# Altium PCB first_test.PcbDoc (part 3 of 5)
Units mil, origin at the board's own origin, x right, y up, seen from the top; angles counter-clockwise.
Board outline 3440.59 x 3087.6 mil, 4 copper layers (Top Layer, GND, VCC, Bottom Layer); 175 components, 91 nets, 2807 pads, 1128 vias.
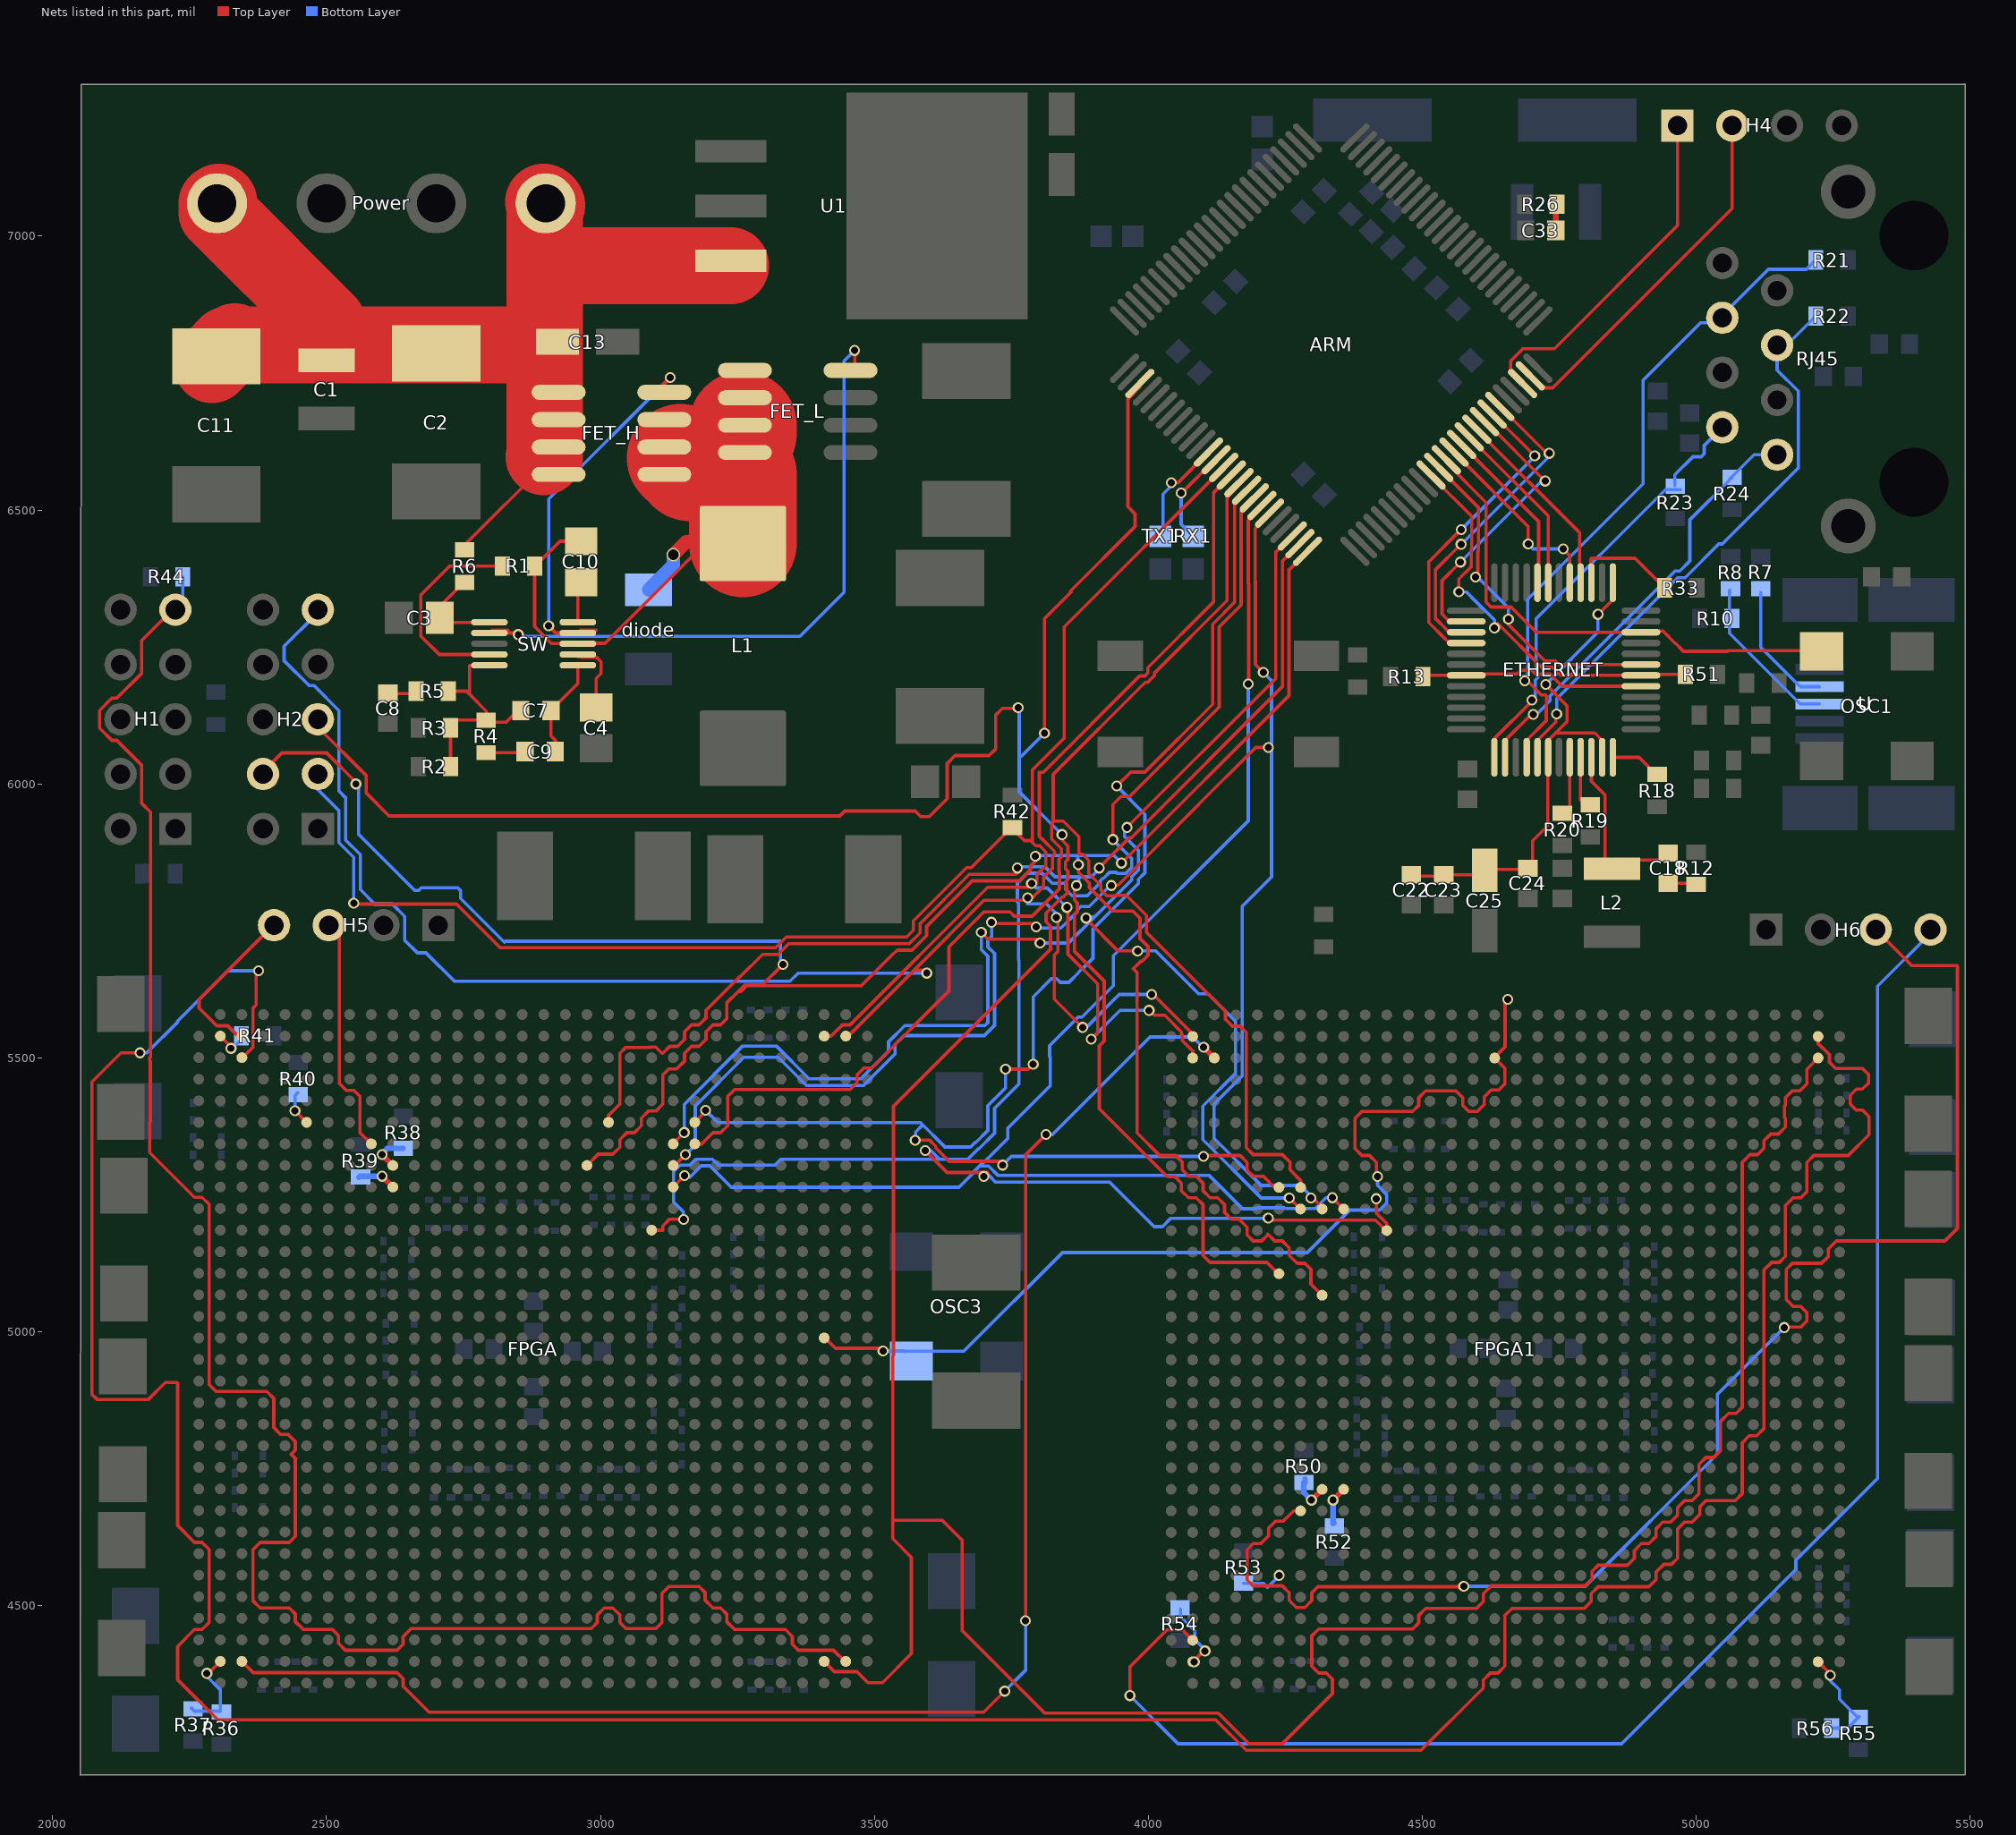
[diagram p5: the nets of this part, all layers, seen from the top]

## Via types
v1: diameter 20, hole 13, Top Layer to Bottom Layer, tented both sides, 907 vias
v2: diameter 20, hole 13, Top Layer to Bottom Layer, 189 vias
v3: diameter 30, hole 20, Top Layer to Bottom Layer, 14 vias
v4: diameter 40, hole 30, Top Layer to Bottom Layer, 12 vias
v5: diameter 50, hole 40, Top Layer to Bottom Layer, 5 vias
v6: diameter 25, hole 20, Top Layer to Bottom Layer, 1 vias

## Nets (pads, with @x,y where several pads share a name; then routed paths per layer and width w, separated by ;. In a path a pad name is that pad's centre, name@x,y a point inside that pad or via, vN(x,y) a via of type N, cw(c..) or ccw(c..) an arc to the next point about the centre after c; other vN are vias at no path point) (continued)
NetARM_53: ARM.53 FPGA1.AL30 FPGA.AL30 H2.5 | length 7459.4
  Top Layer w6: H2.5@2484.72,6102.83 2572.55,6015.01 2572.55,5982.95 2614,5941.5 3436.94,5941.5 3445.94,5950.5 3574.56,5950.5 3584.65,5940.41 3600.39,5940.41 3632.73,5972.75 3632.73,6037.19 3647.37,6051.83 3709.41,6051.83 3721.71,6064.14 3721.71,6126.17 3733.54,6138 v2@3762,6138 ; FPGA.AL30@3408.39,4397.84 3427.23,4378.99 3468.28,4378.99 3488.13,4359.15 3514.68,4359.15 3567.5,4411.97 3567.5,4587.87 3533.46,4621.91 3533.46,4955.41 3534.75,4956.7 3534.75,5411.39 3821.52,5698.16 ; 3533.5,4655.5 3623.75,4655.5 3660.22,4619.03 3660.22,4454.28 3811.03,4303.47 4127.66,4303.47 4183.63,4247.5 4244.72,4247.5 4336.2,4338.97 4336.2,4365.57 4325.16,4376.61 4311.23,4376.61 4298.51,4389.33 4298.51,4444.31 4311.23,4457.03 4482.64,4457.03 4493.68,4468.07 4493.68,4481.99 4506.4,4494.72 4599.06,4494.72 4611.79,4507.44 4611.79,4521.36 4626.19,4535.77 4797.6,4535.77 4810.32,4548.49 4810.32,4562.42 4821.36,4573.46 4874.66,4573.46 4887.38,4586.18 4887.38,4600.1 4900.1,4612.83 4914.03,4612.83 4926.75,4625.55 4926.75,4639.47 4939.47,4652.2 4953.4,4652.2 4966.12,4664.92 4966.12,4678.84 4978.84,4691.57 4992.77,4691.57 5005.49,4704.29 5005.49,4757.58 5018.21,4770.31 5032.14,4770.31 5044.86,4783.03 5044.86,4836.32 5059.27,4850.73 5073.19,4850.73 5084.23,4861.77 5084.23,5308.77 5098.64,5323.17 5112.56,5323.17 5123.6,5334.21 5123.6,5348.14 5136.32,5360.86 5150.25,5360.86 5162.97,5373.58 5162.97,5389.19 5161.5,5390.66 5161.5,5411.48 5162.97,5412.95 5162.97,5426.88 5175.69,5439.6 5189.62,5439.6 5202.34,5452.32 5202.34,5478.97 FPGA1.AL30@5222.87,5499.5 ; v2@3762.5,6138 v2(3762.5,6139) ; v2(3810.5,6092.5) 3810.5,6301.5 3859.5,6350.5 ; 3822.83,5698.82 3822.18,5698.82 3821.52,5698.16 ; v2(3842.5,5907.5) 3843,5907 3843,5896.78 3853.43,5886.36 3853.43,5862.3 3849,5857.87 3849,5844.97 3853.43,5840.55 3853.43,5825.8 3850,5822.37 3850,5806.63 3853.43,5803.2 3853.43,5801.95 3844.97,5793.5 3843.13,5793.5 3813.5,5763.87 3813.5,5748.13 3821.52,5740.11 3821.52,5698.16 ; 3858,6352 3976,6470 3976,6492.87 3962.76,6506.11 3962.76,6702.39 3984.62,6724.25 ARM.53@3984.62,6731.01
  Bottom Layer w6: v2@3764.35,6137.15 3764.35,6051 ; v2(3810.5,6092.5) 3769,6051 3764.35,6051 ; v2(3842.5,5907.5) 3764.35,5985.65 3764.35,6051
NetARM_62: ARM.62 TX1.1 | length 187.7
  Top Layer w6: v2(4042,6550) 4054.16,6550 ARM.62@4109.9,6605.74
  Bottom Layer w6: TX1.1@4027,6462 4027,6529 4045,6547 v2(4042,6550)
NetARM_63: ARM.63 RX1.1 | length 168.6
  Top Layer w6: v2(4060,6531) 4061,6531 4121.82,6591.82 ARM.63@4123.82,6591.82
  Bottom Layer w6: v2(4060,6531) 4060,6474 RX1.1@4076,6458
NetARM_64: ARM.64 FPGA1.B30 FPGA.B30 H2.3 R42.1 | length 3697.7
  Top Layer w6: H2.3@2483.46,6010.79 H2.3@2506.85,6010.79 ; v2(2549.5,5782) 2550.97,5780.53 2737.26,5780.53 2816.9,5700.88 3319.54,5700.88 3339.19,5720.53 3559.02,5720.53 3571.32,5732.83 3571.32,5749.8 3668.52,5847 3677,5847 R42.1@3753.5,5923.5 ; FPGA.B30@3408.39,5539.57 3421.11,5539.57 3441.64,5560.09 3455.78,5560.09 3706.69,5811 3780,5811 v2(3787,5818) ; R42.1@3751.24,5921.24 R42.1@3752,5920.47 ; R42.1@3755.51,5914.57 3773.55,5896.53 3788.53,5896.53 ; v2@3796.87,5818 3796.87,5834.52 3813,5850.66 3813,5875.87 3801.87,5887 3794.37,5887 3788.53,5892.84 3788.53,5896.53 ; v2(3851.5,5774.5) 3853.5,5772.5 3853.5,5688.97 3907.5,5634.97 3907.5,5545.5 v2(3896,5534) ; v1(4001.5,5586.5) 4010.56,5577.44 4030.25,5577.44 4060.61,5547.08 4060.61,5543 4060.91,5542.7 ; 4060.91,5543 4060.91,5542.7 ; FPGA1.B30@4081.13,5499.5 4081.13,5512.22 4062.29,5531.06 4062.29,5541.31 4060.91,5542.7 ; FPGA1.B30@4081.43,5499.39 FPGA1.B30@4081.43,5499.5 ; ARM.64@4137.74,6577.9 3846.5,6286.66 3846.5,6083.47 3788.53,6025.5 3788.53,5896.53
  Bottom Layer w6: H2.3@2484,6018 2484,5989.78 2522.53,5951.26 2522.53,5892.99 2549.5,5866.02 v2(2549.5,5782) ; v2(3787,5818) 3795,5810 3816,5810 v2(3851.5,5774.5) ; v2(3896,5534) 3948.5,5586.5 v1(4001.5,5586.5)
NetARM_65: ARM.65 FPGA1.B31 FPGA.B31 H2.9 | length 3720.4
  Top Layer w6: FPGA.B31@3447.76,5539.57 3452.23,5539.57 3572.34,5659.68 ; v2@3590.46,5659.68 3572.34,5659.68 ; v2@3780,5787.35 3700.01,5787.35 3572.34,5659.68 ; v2(3780,5792) 3788,5792 3796.5,5800.5 ; 3796.66,5800.34 3808.87,5812.54 3808.87,5829.55 3825,5845.69 3825,5867.81 3829.43,5872.24 3829.43,5876.42 3806.84,5899 3806.22,5899 3801,5904.22 3801,6020.87 3807.87,6020.87 3984.24,6197.24 3993.93,6197.24 3999.2,6202.51 3999.2,6212.2 4119,6332 4119,6531.32 ARM.65@4151.66,6563.98 ; v2(3832.5,5756) 3834.5,5758 3837,5758 3834.83,5755.83 3834.83,5693.85 3828.28,5687.3 3828.28,5607.22 v2(3880,5555.5) ; v1(4006,5615.5) 4009.16,5615.5 4081.43,5543.23 FPGA1.B31@4081.43,5538.76
  Bottom Layer w6: H2.9@2480.32,6309.06 2422.53,6251.27 2422.53,6224.99 2468.04,6179.47 2477.01,6179.47 2522.53,6133.96 2522.53,5987.06 2534.53,5975.06 2534.53,5897.96 2561.5,5870.99 2561.5,5807.07 2588.04,5780.53 2619.96,5780.53 2642.53,5757.96 2642.53,5726.04 ; 2642.35,5725.87 2642.35,5714.89 2665.77,5691.47 2681.48,5691.47 2733.45,5639.5 3345.84,5639.5 3360.79,5654.45 v2(3595.68,5654.45) ; v2(3780,5792) 3780,5781 3814,5781 3837,5758 3834.5,5758 v2(3832.5,5756) ; v2(3880,5555.5) 3883.5,5552 3947,5615.5 v1(4006,5615.5)
NetARM_66: ARM.66 FPGA1.G24 FPGA.G24 | length 2773.6
  Top Layer w6: FPGA.G24@3172.17,5342.72 3184.89,5342.72 3205.42,5363.24 3219.34,5363.24 3232.06,5375.97 3232.06,5429.26 3244.79,5441.98 3455.56,5441.98 3468.28,5454.71 3468.28,5468.63 3481.01,5481.35 3495.15,5481.35 3636,5622.2 3636,5702.53 3699.79,5766.32 3747.18,5766.32 ; 3747.68,5766.32 3755.5,5758.5 3788.13,5758.5 3838,5808.37 3838,5839 ; 3826.5,6017 3826.5,5935 3829.5,5932 3844.87,5932 3873.36,5903.51 3873.36,5871.51 3880.37,5871.5 3891.5,5860.37 3891.5,5836.64 3913.5,5814.64 3913.5,5806.63 3924.63,5795.5 3940.37,5795.5 ; 3826.5,6017.46 3994.27,6185.24 3998.9,6185.24 4011.2,6197.54 4011.2,6202.17 4143.71,6334.67 4143.71,6523.1 4167.5,6546.89 ARM.66@4167.5,6549.5 ; 3828.07,5932 3823.5,5927.43 3823.5,5899.31 3841.43,5881.39 3841.43,5867.27 3837,5862.84 3837,5840 ; 3941.34,5796.47 3960.16,5796.47 3996.76,5759.87 3996.76,5729.03 4139.65,5586.15 ; 4139.65,5584.7 4141.03,5583.31 4141.03,5570.43 4153.75,5557.71 4167.68,5557.71 4178.72,5546.67 4178.72,5335.9 4191.44,5323.17 4244.73,5323.17 4259.14,5308.77 4259.14,5294.84 4277.98,5276 FPGA1.G24@4277.98,5263.28 ; FPGA1.G24@4278.28,5263.17 FPGA1.G24@4278.28,5263.28
NetARM_67: ARM.67 FPGA1.F24 FPGA.F24 | length 2811.1
  Top Layer w6: FPGA.F24@3172.17,5382.09 v1@3191.93,5401.85 ; v2(3574.5,5349.5) 3600.87,5349.5 3612,5338.37 3612,5335.38 3636.36,5311.02 3726.98,5311.02 v2(3734,5304) ; v2(3739.49,5479.29) 3780.87,5479.29 v2(3789.92,5488.35) ; v2(3942.5,5996) 3968.15,6021.65 3993.93,6021.65 4117.5,6145.21 4117.5,6291.49 4157.38,6331.37 4157.38,6512.38 ARM.67@4178,6533 ; v1(4101,5320) 4102.49,5321.49 4167.68,5321.49 4180.4,5308.77 4180.4,5294.84 4191.44,5283.8 4209.92,5283.8 4230.45,5263.28 FPGA1.F24@4238.61,5263.28 ; FPGA1.F24@4238.71,5263.37 FPGA1.F24@4238.91,5263.17
  Bottom Layer w6: v1(3191.93,5404.13) 3214.66,5381.4 3584.31,5381.4 3628.69,5337.02 3675.74,5337.02 3684.22,5345.5 3685.51,5345.5 3707.31,5367.3 3707.31,5412.8 3739.49,5444.98 v2(3739.49,5479.29) ; v2(3574.5,5349.5) 3575.5,5350.5 3575.5,5364.5 3588,5377 ; v2(3734,5304) 3750,5320 v1(4101,5320) ; v2(3789.92,5488.35) 3789.92,5611.26 3823.31,5644.65 3832.41,5644.65 3839.41,5637.65 3855.15,5637.65 3873.35,5655.85 ; 3873.35,5656.82 3880.38,5663.85 ; 3881.35,5663.85 3899.1,5681.6 3899.1,5735.09 3982.01,5817.99 3982.01,5825.7 3994,5837.69 3994,5944.5 v2(3942.5,5996)
NetARM_68: ARM.68 FPGA1.L22 FPGA.L22 | length 3365.7
  Top Layer w6: FPGA.L22@3093.43,5185.24 3113.95,5185.24 3113.95,5193.04 3125.83,5204.92 v1(3151.65,5204.92) ; v2(3593,5330.5) 3633,5290.5 3707,5290.5 v2(3700,5283.5) ; v2(3935.5,5898.5) 3935.5,5962.37 3950.13,5977 3966.26,5977 4129.5,6140.24 4129.5,6286.52 4169.38,6326.4 4169.38,6497.38 ARM.68@4184,6512 ; ARM.68@4183.6,6512.4 ARM.68@4193.41,6522.22 ; v1(4218.93,5207.04) 4222.59,5203.38 4414.94,5203.38 4433.78,5184.54 FPGA1.L22@4435.46,5184.54 4435.46,5197.26 4416.62,5216.1 4416.62,5238.38 v1@4416.08,5238.92 ; v1@4416,5239 v1@4416.08,5238.92 ; v1(4416.08,5242.65) v1@4416.08,5238.92 ; FPGA1.L22@4435.76,5184.43 FPGA1.L22@4435.76,5184.54
  Bottom Layer w6: v1(3151.65,5204.92) 3151.65,5218.25 3133.48,5236.42 3133.48,5291.93 3145.61,5304.06 3163.14,5304.06 3173.75,5314.66 3204.69,5314.66 3215.32,5304.03 3318.33,5304.03 3328.96,5314.66 3670.35,5314.66 3689.19,5333.5 3690.48,5333.5 3719.31,5362.33 3719.31,5407.83 3763.84,5452.37 3763.84,5677.75 3763.4,5678.19 3763.4,5781.73 3761,5784.13 3761,5818.87 3779.13,5837 3805.97,5837 3824.62,5818.35 3847.28,5818.35 3850,5815.63 3850,5806.63 3861.13,5795.5 3888.39,5795.5 3912.65,5819.76 3912.65,5823.34 3916.81,5827.5 3918.37,5827.5 3929.5,5838.63 3941,5838.63 3943.13,5836.5 3958.87,5836.5 3970,5847.63 3970,5863.37 3935.87,5897.5 3935.87,5898.13 v2(3935.5,5898.5) ; v2(3593,5330.5) 3603,5330.5 3618.5,5315 ; v2(3700,5283.5) 3703.66,5287.16 3707,5287.16 3721.16,5273 3929.25,5273 4010.44,5191.81 4026.18,5191.81 4041.41,5207.04 v1(4218.93,5207.04)
NetARM_69: ARM.69 FPGA1.J23 FPGA.J23 | length 2753.4
  Top Layer w6: FPGA.J23@3135.04,5263.9 3135.04,5266.61 v1(3153.43,5285) ; v2(4182.5,6182.5) 4183.5,6183.5 4183.5,6364.97 4182.5,6365.97 4182.5,6481.5 ARM.69@4208.5,6507.5 ; v1(4336,5244.43) 4354.39,5226.04 FPGA1.J23@4357.1,5226.04
  Bottom Layer w6: v1(3153.43,5285) 3153.43,5283.66 3154.8,5282.28 3163.6,5282.28 3183.98,5302.66 3199.72,5302.66 3238.94,5263.44 3654.36,5263.44 3681,5290.08 3681,5291.37 3699.13,5309.5 3700.42,5309.5 3743.31,5352.39 3743.31,5370.83 3820.92,5448.44 3820.92,5501.19 3819.87,5502.24 3819.87,5522.24 3872.13,5574.5 3879.13,5574.5 3936.1,5631.47 3936.1,5686.06 4182.5,5932.46 v2(4182.5,6182.5) ; 3692.5,5302.5 3708.63,5302.5 3726.13,5285 4111.47,5285 4171.99,5224.48 4197.29,5224.48 4198.86,5226.04 4248.46,5226.04 4249.55,5224.95 4304.82,5224.95 4324.3,5244.43 v1(4336,5244.43) 4337.34,5244.43 v1@4338.72,5245.8
NetARM_70: ARM.70 FPGA1.H23 FPGA.H23 | length 3072.2
  Top Layer w6: FPGA.H23@3132.8,5303.35 3135.56,5303.35 v1(3155.27,5323.06) ; v2@3713.77,5744.88 v2@3794.29,5744.88 ; v2@3932.5,5815.47 3945.39,5815.47 4091.23,5961.31 ; 4090,5960.5 4196,6066.5 v2(4219.5,6066.5) ; v2(4210,6203.5) 4195.5,6218 4195.5,6369.94 4195,6370.44 4195,6466 ARM.70@4214,6485 ; v1@4297.94,5246.27 4317.65,5226.56 FPGA1.H23@4317.65,5223.8
  Bottom Layer w6: v1(3155.27,5323.06) 3172.93,5340.72 3172.93,5412 3261.81,5500.88 3324.49,5500.88 3375.86,5449.51 3480.28,5449.51 3537.81,5507.04 3537.81,5524.01 3554.39,5540.59 3700.72,5540.59 3719.31,5559.18 3719.31,5690.33 3707.31,5702.33 3707.31,5714.22 3714.24,5721.15 v2@3714.24,5746.85 ; v2@3797.5,5737 3840.87,5737 3870.5,5766.63 3870.5,5769.87 3876.63,5776 3892.18,5776 v2@3931.59,5815.41 ; v2(4210,6203.5) 4224.87,6188.63 4224.87,5829.89 4171.49,5776.51 4171.49,5466.86 4120.12,5415.49 4120.12,5352.81 4206.14,5266.78 4277.43,5266.78 v1@4297.94,5246.27
  other v1: 4297,5244
  other v2: 3795.5,5739 3713.77,5747.32 3932.5,5814.5
NetARM_73: ARM.73 FPGA1.G23 FPGA.G23 | length 2877.7
  Top Layer w6: FPGA.G23@3132.8,5342.72 3132.8,5343.43 v1(3152.95,5363.58) ; v2(3695.24,5729.02) 3707.6,5716.65 3795.32,5716.65 v2(3802.52,5709.45) ; v2(3886.5,5755) 3885.5,5756 v2@3887.5,5756 ; v2@3887.5,5752.5 3945,5695 v2(3980.5,5695) ; v2(3961,5920.5) 4232.8,6192.3 4232.8,6423.3 4263,6453.5 ARM.73@4263,6454.5 ; v1(4257.42,5243.95) 4277.57,5223.8 FPGA1.G23@4278.28,5223.8
  Bottom Layer w6: v1(3152.95,5363.58) 3152.95,5414.74 3259.71,5521.5 3320.84,5521.5 3380.83,5461.51 3475.31,5461.51 3525.81,5512.01 3525.81,5528.98 3555.7,5558.87 3702.03,5558.87 3707.31,5564.15 3707.31,5685.35 3695.24,5697.43 v2(3695.24,5729.02) ; v2(3802.52,5709.45) 3854.32,5709.45 3901.87,5757 ; v2(3886.5,5755) 3884.5,5757 3901.87,5757 ; 3905,5760 3902,5757 3901.87,5757 ; v2(3961,5920.5) 3956.51,5916.01 3956.51,5904.01 3982,5878.51 3982,5842.66 3970.01,5830.67 3970.01,5825.14 3901.87,5757 ; v2(3980.5,5695) 4013.83,5695 4092.02,5616.81 4108.99,5616.81 4159.49,5566.31 4159.49,5471.83 4099.5,5411.84 4099.5,5350.71 4206.26,5243.95 v1(4257.42,5243.95)
NetARM_74: ARM.74 FPGA1.F20 FPGA.F20 | length 2904.4
  Top Layer w6: FPGA.F20@3014.69,5382.09 3014.69,5394.81 3035.21,5415.34 3035.21,5508 3046.25,5519.04 3090.55,5519.04 ; 3090.55,5519.69 3100.59,5519.69 3112.27,5508 ; 3113.95,5508 3126.68,5520.72 3140.6,5520.72 3153.32,5533.45 3153.32,5547.37 3166.05,5560.09 3179.97,5560.09 3192.69,5572.82 3192.69,5586.74 3253.98,5648.02 ; 3254.5,5647.5 3295.88,5688.88 3324.51,5688.88 3344.16,5708.53 3563.99,5708.53 3583.32,5727.86 3583.32,5744.83 3673.49,5835 3758.5,5835 v2@3765.5,5842 ; v2@3865.5,5811 3865.5,5787.37 3870.5,5782.37 3870.5,5766.63 3865.5,5761.63 3865.5,5693.95 3919.5,5639.95 3919.5,5530.63 3910.65,5521.78 3910.65,5407.11 4034.07,5283.69 4037,5283.69 ; v2@3913,5845.5 3913,5849.5 3943,5879.5 3943.37,5879.5 3954.5,5890.63 3954.5,5891 3965,5901.5 3968.87,5901.5 4244.8,6177.43 4244.8,6406.57 ARM.74@4276.93,6438.7 ; 4037,5283 4048.69,5283 4060.61,5271.08 4060.61,5257.16 4073.33,5244.43 4087.25,5244.43 4099.98,5231.71 4099.98,5139.05 4112.7,5126.32 4216.4,5126.32 4236.93,5105.8 FPGA1.F20@4238.61,5105.8 ; FPGA1.F20@4238.61,5105.69 FPGA1.F20@4238.91,5105.69
  Bottom Layer w6: v2@3763.5,5849 3810.94,5849 3829.59,5830.35 3873.5,5830.35 ; v2@3873.5,5819 3873.5,5830.35 ; v2@3910.51,5844.49 3896.38,5830.35 3873.5,5830.35
  other v2: 3869,5814.5 3761,5846.5 3910.5,5846.5
NetARM_75: ARM.75 FPGA1.H19 FPGA.H19 H2.4 | length 4444
  Top Layer w6: H2.4@2381.95,6020.06 2418.42,6056.53 2499.96,6056.53 v2@2553.55,6002.93 ; FPGA.H19@2975.32,5303.35 2995.84,5323.87 3022.49,5323.87 3035.21,5336.6 3035.21,5350.52 3047.94,5363.24 3061.86,5363.24 3074.58,5375.97 3074.58,5389.89 3087.31,5402.61 3101.23,5402.61 3113.95,5415.34 3113.95,5468.63 3124.99,5479.67 3138.92,5479.67 3153.32,5494.08 3153.32,5508 3166.05,5520.72 3179.97,5520.72 3192.69,5533.45 3192.69,5547.37 3205.42,5560.09 3219.34,5560.09 3230.38,5571.13 3230.38,5600.02 3251.68,5621.32 ; 3263.68,5633.32 3251.68,5621.32 ; 3264,5633 3295.5,5633 v2(3333,5670.5) ; 3533.91,5689.41 3476.26,5631.76 3266.97,5631.76 3256.54,5621.32 3251.68,5621.32 ; 3534.49,5689.41 3541.61,5696.53 3568.96,5696.53 3595.32,5722.89 3595.32,5739.86 3678.47,5823 3764.37,5823 3784.87,5843.5 3784.87,5849.83 v2@3796.65,5861.61 ; v2(3872.5,5852.5) 3872.5,5838.67 3892.5,5818.67 3892.5,5810.66 3935.16,5768 3971.67,5768 3984.76,5754.9 3984.76,5717.61 3999.5,5702.87 3999.5,5687.13 3988.37,5676 ; v2(3951,5855.5) 4256.8,6161.3 4256.8,6390.73 ARM.75@4288.5,6422.43 ; 3986.39,5676 3972.76,5662.37 3979.63,5655.51 3979.63,5362.72 4020.98,5321.38 ; 4021.51,5321.49 4049.57,5321.49 4062.29,5308.77 4062.29,5294.84 4073.33,5283.8 4087.25,5283.8 4099.98,5271.08 4099.98,5257.16 4112.7,5244.43 4126.62,5244.43 4139.35,5231.71 4139.35,5217.79 4152.07,5205.06 4165.99,5205.06 4180.4,5190.66 4180.4,5176.73 4191.44,5165.69 4207.05,5165.69 4218.09,5176.73 ; 4218.09,5178.42 4230.81,5165.69 4244.73,5165.69 4257.46,5152.97 4257.46,5139.05 4271.86,5124.64 4285.79,5124.64 4296.83,5113.6 4296.83,5086.95 FPGA1.H19@4317.35,5066.43 ; ARM.75@4288.5,6423.5 ARM.75@4288.5,6422.43 ; ARM.75@4290.85,6424.78 ARM.75@4288.5,6422.43 ; FPGA1.H19@4317.45,5066.52 FPGA1.H19@4317.65,5066.32
  Bottom Layer w6: v2(2553.55,5999.87) 2558.53,5994.9 2558.53,5907.9 2661.17,5805.26 2667.47,5805.26 2672.74,5810.53 2739.26,5810.53 2744.53,5805.26 2744.53,5790.94 2824.68,5710.79 ; 2826.78,5712.88 3328.5,5712.88 3328.5,5675 v2(3333,5670.5) ; v2@3800,5869 3871.5,5869 ; v2@3871.5,5853.5 3871.5,5869 ; v2(3951,5855.5) 3937.5,5869 3871.5,5869
  other v2: 3794,5868
NetARM_86: ARM.86 ETHERNET.30 R51.1 | length 735
  Top Layer w6: ARM.86@4519.5,6559.5 4590.5,6488.5 4590.5,6430.13 4589.5,6429.13 4589.5,6396.37 4567,6373.87 v2(4567,6350.5) ; v2(4631.98,6284.75) 4631.98,6286.98 4638,6293 4718.5,6212.5 4738.34,6212.5 4752.68,6198.16 ETHERNET.30@4899.45,6198.16 ; ETHERNET.30@4906.5,6198 4908.5,6200 R51.1@4980.47,6200
  Bottom Layer w6: v2(4567,6350.5) 4580.5,6350.5 4597.5,6333.5 4631.98,6299.02 v2(4631.98,6284.75)
NetARM_87: ARM.87 ETHERNET.31 | length 618.6
  Top Layer w6: ARM.87@4532,6576.5 ARM.87@4540,6568.5 ; ARM.87@4539.5,6568 4602.5,6505 4602.5,6425.16 4601.5,6424.16 4601.5,6377.5 v2(4597.5,6377.5) ; v2(4657.5,6301) 4657,6300.5 4657,6291.57 4724.07,6224.5 4743.31,6224.5 4749.97,6217.84 ETHERNET.31@4899.45,6217.84
  Bottom Layer w6: v2(4597.5,6377.5) 4601.5,6377.5 4601.5,6377.26 4657.5,6321.26 v2(4657.5,6301)
NetARM_88: ARM.88 ETHERNET.34 OSC1.3 | length 931
  Top Layer w6: ARM.88@4547.5,6588.5 4547.5,6583 4616.83,6513.67 4616.83,6424.2 4616.5,6423.87 4616.5,6332.07 4625.56,6323.01 4662.36,6323.01 4708.47,6276.9 ETHERNET.34@4899.45,6276.9 ; ETHERNET.34@4906,6279 4939.63,6279 4962.13,6256.5 4962.87,6256.5 4974,6245.37 4974,6244.63 4976.63,6242 5057.63,6242 5058.63,6243 5228.32,6243 OSC1.3@5229.32,6242
NetARM_89: ARM.89 ETHERNET.41 | length 355.2
  Top Layer w6: ARM.89@4567.4,6600.5 4563,6600.5 4693.5,6470 v2(4693.5,6438) ; v2(4757.5,6429) 4769.53,6416.97 ETHERNET.41@4769.53,6367.45
  Bottom Layer w6: v2(4693.5,6438) 4702.5,6429 v2(4757.5,6429)
NetARM_90: ARM.90 ETHERNET.44 | length 306.1
  Top Layer w6: ARM.90@4574.5,6613.5 4578,6613.5 4712.5,6479 4712.5,6369.48 ETHERNET.44@4710.47,6367.45
NetARM_91: ARM.91 ETHERNET.43 | length 321.5
  Top Layer w6: ARM.91@4589,6630.5 4730.16,6489.34 ETHERNET.43@4730.16,6367.45
NetARM_92: ARM.92 ETHERNET.40 | length 341.8
  Top Layer w6: ARM.92@4603.5,6641.5 4604.5,6641.5 4784.43,6461.57 4787.5,6458.5 ETHERNET.40@4787.5,6376.5
NetARM_93: ARM.93 ETHERNET.2 | length 529.2
  Top Layer w6: 4542.5,6303.5 4549.42,6296.58 ETHERNET.2@4580.55,6296.58 ; 4544.85,6301.36 4536.12,6310.09 4536.12,6371.12 v2(4570,6405) ; ARM.93@4617,6658.5 4619,6658.5 v2(4724.5,6553)
  Bottom Layer w6: v2(4570,6405) 4718,6553 v2(4724.5,6553)
NetARM_94: ARM.94 ETHERNET.4 | length 573
  Top Layer w6: v2(4571.5,6464) 4570.63,6464 4512.12,6405.49 4512.12,6294.72 4540.92,6265.92 4544.85,6261.99 4549.63,6257.21 ETHERNET.4@4580.55,6257.21 ; ARM.94@4631,6670.5 4634,6670.5 v2(4705.5,6599)
  Bottom Layer w6: v2(4571.5,6464) 4705.5,6598 v2(4705.5,6599)
NetARM_95: ARM.95 ETHERNET.3 | length 584.2
  Top Layer w6: 4542,6284 4549.1,6276.9 ETHERNET.3@4580.55,6276.9 ; 4544.85,6281.68 4524.12,6302.41 4524.12,6390.62 v2(4571,6437.5) ; ARM.95@4642,6688.5 4642.87,6688.5 4724.5,6606.87 4724.5,6606 4727,6603.5 v2(4732,6603.5)
  Bottom Layer w6: v2(4571,6437.5) 4571.87,6437.5 4732,6597.63 v2(4732,6603.5)
NetARM_98: ARM.98 H4.1 | length 629.5
  Top Layer w6: ARM.98@4674,6737.5 4661.51,6749.99 4661.51,6771.98 4684.16,6794.63 4741.63,6794.63 4966,7019 H4.1@4966,7202
NetARM_99: ARM.99 H4.2 | length 666.4
  Top Layer w6: ARM.99@4696.5,6747 4720.43,6723.07 4738.27,6723.07 5066,7050.8 H4.2@5066,7202
NetC3_1: C3.1 R6.1 SW.1 | length 156.1
  Top Layer w6: C3.1@2706.69,6303.15 2706.69,6324.02 R6.1@2749.17,6366.5 ; C3.1@2723.31,6294.96 SW.1@2798.46,6294.96
NetC4_2: C4.2 SW.7 | length 143.5
  Top Layer w6: SW.7@2953.46,6237.83 SW.7@2959.65,6231.65 ; SW.7@2958.66,6236.22 2959.84,6236.22 2964.62,6231.44 2992.39,6231.44 3001.12,6222.71 3001.12,6201.63 2992.13,6192.63 C4.2@2992.13,6139.76
NetC7_1: C7.1 R2.1 R3.2 R4.2 R5.1 SW.5 | length 417.2
  Top Layer w6: R5.1@2722.44,6169.29 2755.83,6169.29 2760.76,6164.36 ; R3.2@2723.39,6101.69 R3.2@2723.39,6112.48 ; R2.1@2726.38,6031.5 R3.2@2726.38,6102.36 ; R3.2@2727.32,6116.42 R4.2@2791.34,6116.42 ; 2763.24,6161.02 2791.34,6132.93 R4.2@2791.34,6116.42 ; 2763.24,6161.04 2763.66,6161.46 2760.76,6164.36 ; R4.2@2791.34,6116.14 R4.2@2791.34,6116.42 ; SW.5@2797.24,6216.54 2760.76,6216.54 2760.76,6164.36 ; C7.1@2852.68,6137.56 2827.6,6112.48 2789.76,6112.48 2792.38,6115.1 2793.7,6116.42 R4.2@2791.34,6116.42
NetC7_2: C7.2 C9.2 SW.6 | length 200.4
  Top Layer w6: C7.2@2905.79,6140.51 C7.2@2910.95,6135.35 ; C9.2@2917.32,6059.06 2917.32,6079.77 2909.45,6087.65 C7.2@2909.45,6133.86 C7.2@2910.95,6135.35 ; C7.2@2917.32,6128.98 C7.2@2910.95,6135.35 ; SW.6@2958.39,6219.65 2958.39,6182.79 C7.2@2910.95,6135.35
NetC8_2: C8.2 R5.2 | length 59
  Top Layer w6: C8.2@2606.3,6165.36 2627.03,6165.36 2627.35,6165.04 2652.17,6165.04 2656.42,6169.29 R5.2@2663.38,6169.29
NetC9_1: C9.1 R4.1 | length 71.7
  Top Layer w6: R4.1@2791.34,6057.09 2850.9,6057.09 2852.87,6059.06 C9.1@2862.21,6059.06
NetC10_1: C10.1 diode.2 FET_H.1 FET_H.2 FET_H.3 FET_L.5 FET_L.6 FET_L.7 FET_L.8 L1.1 R1.2 SW.8 | length 1210
  Top Layer w6: R1.2@2879.92,6397.64 2879.92,6287.21 2910.63,6256.5 SW.8@2955.39,6256.5 ; R1.2@2879.96,6396.73 2926.14,6442.91 2956.26,6442.91 C10.1@2958.27,6440.91 ; SW.8@2953.07,6256.65 2955.39,6256.65 3008.27,6256.65 L1.1@3190.59,6438.98 ; 3163.67,6438.98 L1.1@3190.59,6438.98 ; L1.1@3193.9,6442.28 L1.1@3190.59,6438.98 ; L1.1@3259.84,6438.98 L1.1@3190.59,6438.98
  Top Layer w25: FET_H.3@3116.46,6665 3164.96,6616.5 FET_L.8@3253.5,6616.5 ; v6(3133,6418.5) 3156.5,6442 L1.1@3218,6442
  Top Layer w196.85: 3146.65,6595.19 3163.34,6578.5 ; L1.1@3259.84,6438.98 3259.84,6565 ; 3259.84,6639.99 FET_L.7@3259.84,6655
  Bottom Layer w25: diode.2@3088,6354.44 3133,6399.44 v6(3133,6418.5)
NetC10_2: C10.2 SW.10 | length 68.8
  Top Layer w6: SW.10@2958.66,6295.28 2958.66,6361.1 C10.2@2960.79,6363.23
NetC18_1: C18.1 ETHERNET.22 L2.2 | length 328.4
  Top Layer w6: ETHERNET.22@4808.9,6048.55 4808.9,6004.58 4833.8,5979.67 4833.8,5852.7 L2.2@4841.5,5845 ; L2.2@4844.33,5862.91 4846.46,5860.79 4933.94,5860.79 C18.1@4948.7,5875.55
NetC18_2: C18.2 R12.2 | length 58.3
  Top Layer w6: C18.2@4948.82,5818.46 5002.48,5818.46 R12.2@5005.75,5821.73
NetC22_1: C22.1 C23.1 C24.1 C25.1 ETHERNET.18 ETHERNET.23 ETHERNET.37 | length 960.9
  Top Layer w6: C22.1@4484.96,5831.42 4536.57,5831.42 C23.1@4539.37,5834.21 4607.01,5834.21 4616.61,5843.82 C24.1@4691.32,5843.82 ; C24.1@4691,5843.5 C24.1@4691.32,5843.82 ; C24.1@4691.99,5842.51 4693.31,5843.82 C24.1@4691.32,5843.82 ; v2(4725.5,6181.5) 4764.5,6142.5 4764.5,6113.82 4743.67,6092.98 ; v2(4821,6309.5) 4821.24,6309.5 4847.5,6335.76 ETHERNET.37@4847.5,6369.5 ; ETHERNET.23@4829.5,6048.5 4830,6049 4830,6078.06 4815.07,6092.98 4743.67,6092.98 ; C24.1@4691.32,5843.82 4701.69,5854.19 4701.69,5896.27 4729.19,5923.77 4729.19,6047.58 ETHERNET.18@4730.16,6048.55 4730.16,6079.47 4743.67,6092.98
  Bottom Layer w6: v2(4725.5,6181.5) 4821,6277 v2(4821,6309.5)
NetC33_2: C33.2 R26.2 | length 44.1
  Top Layer w10: C33.2@4744.06,7010.5 4744.06,7052.56 R26.2@4745.5,7054
NetETHERNET_7: ETHERNET.7 ETHERNET.29 R13.1 | length 420
  Top Layer w6: R13.1@4499,6199.5 4500.34,6198.16 ETHERNET.7@4577.66,6198.16 ; ETHERNET.7@4577.5,6198 ETHERNET.7@4577.66,6198.16 ; ETHERNET.7@4580.55,6198.16 ETHERNET.7@4577.66,6198.16 ; ETHERNET.29@4899.45,6178.47 4755.4,6178.47 4733.37,6200.5 4707.37,6200.5 4700.37,6207.5 4679.63,6207.5 4673.13,6201 4580.5,6201 ETHERNET.7@4577.66,6198.16
NetETHERNET_13: ETHERNET.13 R23.2 RJ45.2 | length 817.8
  Top Layer w6: ETHERNET.13@4631.73,6048.55 4631.73,6082.6 v2@4700.63,6151.5 ; v2(4700.26,6153) 4708,6153 4702.13,6153 v2@4700.63,6151.5 ; v2@4703.5,6151.5 v2@4700.63,6151.5
  Bottom Layer w6: v2(4700.26,6153) 4706.5,6159.24 4706.5,6189.37 4711.5,6194.37 4711.5,6196.37 4708,6199.87 4708,6301.5 4944,6537.5 R23.2@4972,6537.5 ; R23.2@4961.5,6544.5 4961.5,6564.5 4994.3,6597.3 5009.63,6597.3 5014.9,6602.57 5014.9,6617.9 RJ45.2@5048,6651
NetETHERNET_14: ETHERNET.14 R24.1 RJ45.1 | length 794.7
  Top Layer w6: ETHERNET.14@4650.5,6053.5 4650.5,6078.56 4698.94,6127 v2(4703,6127)
  Bottom Layer w6: v2(4703,6127) 4708.87,6127 4733.5,6151.63 4733.5,6160.34 4961.66,6388.5 4970.37,6388.5 4988.72,6406.85 4988.72,6482.24 R24.1@5066,6559.53 ; R24.1@5061,6556 5106,6601 RJ45.1@5148,6601
NetETHERNET_16: ETHERNET.16 R21.2 RJ45.6 | length 1221.5
  Top Layer w6: v2(4687.5,6188.5) 4691.63,6188.5 4717.63,6162.5 4725.37,6162.5 4727,6160.87 4727,6135.87 4726.5,6135.37 4726.5,6119.63 4727,6119.13 4727,6115.69 4726.66,6115.34 ; ETHERNET.16@4690.79,6048.55 4690.79,6079.79 4726.5,6115.5
  Bottom Layer w6: v2(4687.5,6188.5) 4692.5,6188.5 4692.5,6337.13 4903.28,6547.91 4903.28,6737.04 5008.25,6842 RJ45.6@5051,6842 ; RJ45.6@5049.21,6856.7 5132.04,6939.53 5201.34,6939.53 R21.2@5218.5,6956.69
NetETHERNET_17: ETHERNET.17 R22.1 RJ45.5 | length 1082.8
  Top Layer w6: ETHERNET.17@4710.47,6048.55 4710.47,6079.47 4744,6113 v2@4744,6126.5 ; v2@4745.5,6125 v2(4745.5,6127.5)
  Bottom Layer w6: v2(4745.5,6127.5) 4745.5,6155.37 4966.63,6376.5 4979.91,6376.5 5041.55,6438.13 5047.89,6438.13 5186.53,6576.78 5186.53,6716.96 5148,6755.49 RJ45.5@5148,6799.5 ; RJ45.5@5139.5,6799.5 RJ45.5@5148,6799.5 ; RJ45.5@5148,6801 RJ45.5@5148,6799.5 ; R22.1@5216.54,6854.33 R22.1@5218.5,6854.33 ; R22.1@5219.65,6854.21 5219.53,6854.33 R22.1@5218.5,6854.33 ; RJ45.5@5148,6799.5 5163.67,6799.5 R22.1@5218.5,6854.33
NetETHERNET_20: ETHERNET.20 R20.2 | length 112.3
  Top Layer w6: R20.2@4755.91,5946.42 R20.2@4755.91,5956.83 ; R20.2@4761.5,5950 4769.53,5958.03 ETHERNET.20@4769.53,6048.55
NetETHERNET_21: ETHERNET.21 R19.2 | length 91.6
  Top Layer w6: ETHERNET.21@4789.21,6048.55 4789.21,5970.79 R19.2@4799,5961
NetETHERNET_24: ETHERNET.24 R18.2 | length 95.8
  Top Layer w6: ETHERNET.24@4848.27,6048.55 4895.95,6048.55 R18.2@4930,6014.5
NetETHERNET_39: ETHERNET.39 R33.2 | length 200.1
  Top Layer w6: ETHERNET.39@4807.5,6368 4807.5,6410 4809.38,6411.88 4888.59,6411.88 R33.2@4942.47,6358
NetFET_H_4: FET_H.4 SW.9 | length 684
  Top Layer w6: v2(2905.5,6288.5) 2918.41,6275.59 SW.9@2958.66,6275.59 2963.44,6280.37 2992.39,6280.37 ; FET_H.4@3096.34,6715.75 FET_H.4@3118.9,6715.75 ; FET_H.4@3113.5,6726 3113.5,6728 v2(3127.5,6742)
  Bottom Layer w6: v2(2905.5,6288.5) 2905.5,6520 v2(3127.5,6742)
NetFET_L_4: FET_L.4 SW.2 | length 1213.4
  Top Layer w6: 2830.98,6280.37 2802.02,6280.37 SW.2@2797.24,6275.59 2846.91,6275.59 v2(2850,6272.5) ; FET_L.4@3439.06,6757.64 FET_L.4@3448.5,6757.64 ; FET_L.4@3464,6756 v2(3464,6791.5)
  Bottom Layer w6: v2(2850,6272.5) 2853,6269.5 3364,6269.5 3444.5,6350 3444.5,6772 v2(3464,6791.5)
NetFPGA1_AL2: FPGA1.AL2 R55.2 R56.1 | length 186.3
  Top Layer w6: FPGA1.AL2@5223.16,4397.02 v1@5244.92,4375.27
  Bottom Layer w6: v1(5244.92,4372.5) 5244.92,4362.77 5261.85,4345.84 5261.85,4328.65 R55.2@5294.5,4296 ; R56.1@5247.53,4276 5277,4276 R55.2@5297.5,4296.5
NetFPGA1_AL31: FPGA1.AL31 FPGA.C3 | length 6232.7
  Top Layer w6: v2(2159.5,5509) 2124.79,5509 2071.72,5455.93 2071.72,4885.48 2080.97,4876.24 2175.03,4876.24 2205.79,4907 2226.81,4907 2227.97,4905.84 2227.97,4646.09 2258.85,4615.21 2272.77,4615.21 2285.5,4602.49 2285.5,4468.77 2272.77,4456.05 2258.63,4456.05 2227.97,4425.39 2227.97,4364.49 2300.99,4291.47 4122.69,4291.47 4178.66,4235.5 4497.96,4235.5 4611.79,4349.33 4611.79,4363.88 4624.51,4376.61 4638.43,4376.61 4651.16,4389.33 4651.16,4481.99 4663.88,4494.72 4795.92,4494.72 4808.64,4507.44 4808.64,4521.36 4821.36,4534.09 4914.03,4534.09 4926.75,4546.81 4926.75,4560.73 4941.16,4575.14 4955.08,4575.14 4966.12,4586.18 4966.12,4639.47 4978.84,4652.2 4992.77,4652.2 5007.17,4666.6 5007.17,4680.53 5018.21,4691.57 5071.51,4691.57 5084.23,4704.29 5084.23,4796.95 5096.95,4809.68 5110.88,4809.68 5123.6,4822.4 5123.6,5111.92 5138.01,5126.32 5151.93,5126.32 5162.97,5137.36 5162.97,5230.03 5177.38,5244.43 5191.3,5244.43 5202.34,5255.47 5202.34,5308.77 5215.06,5321.49 5277.93,5321.49 5315.94,5359.51 5315.94,5392.43 5303.87,5404.5 5292.63,5404.5 5281.5,5415.63 5281.5,5431.37 5292.8,5442.67 5303.71,5442.67 5314.84,5453.8 5314.84,5469.54 5303.71,5480.67 5270.69,5480.67 ; FPGA.C3@2346,5499.5 2365.92,5519.42 2365.92,5590.92 2371.47,5596.47 2371.47,5654.47 v2(2376,5659) ; FPGA1.AL31@5223.16,5538.76 5223.16,5525.84 5243.39,5505.62 5243.39,5491.69 5254.43,5480.65 5259.03,5480.65 5270.67,5480.65
  Bottom Layer w6: v2(2159.5,5509) 2171.84,5509 2227.97,5565.12 2227.97,5567.12 2319.84,5659 v2(2376,5659)
NetFPGA1_B2: FPGA1.B2 R54.2 | length 126.3
  Top Layer w6: FPGA1.B2@4081.43,4397.02 4101.03,4416.62 4103.45,4416.62 v1(4103.64,4416.82)
  Bottom Layer w6: R54.2@4059,4494 4059,4479.7 4084.72,4453.98 4084.72,4438.27 4103.82,4419.17 v1@4103.82,4416.62
  other v1: 4083.99,4396.98
NetFPGA1_B3: FPGA1.B3 H6.4 | length 2853.5
  Top Layer w6: v2(3966.5,4335.5) 3966.5,4387.89 4033.96,4455.35 4062.29,4455.35 FPGA1.B3@4081.13,4436.5
  Bottom Layer w6: v2(3966.5,4335.5) 4054.5,4247.5 4864.29,4247.5 5182.31,4565.51 5182.31,4582.65 5331.5,4731.84 5331.5,5630.5 H6.4@5430.5,5729.5
NetFPGA1_C30: FPGA1.C30 FPGA.AL3 | length 2898.9
  Top Layer w6: FPGA.AL3@2345.39,4397.84 2365.92,4377.31 2628.79,4377.31 2639.83,4366.27 2639.83,4352.35 2687.12,4305.06 3699.56,4305.06 v2(3738,4343.5) ; v2(3776,4472) 3776,5322.5 v2(3813.5,5360)
  Top Layer w10: v1(4101.12,5519.07) FPGA1.C30@4120.8,5499.39
  Bottom Layer w6: v2(3738,4343.5) 3776,4381.5 v2(3776,4472) ; v2(3813.5,5360) 3825.31,5360 4003.38,5538.07 4080.93,5538.07 v1@4100,5519
NetFPGA1_F6: FPGA1.F6 R53.2 | length 78.7
  Top Layer w6: FPGA1.F6@4238.91,4554.5 4238.91,4554.32 4239,4554.41 v1(4239,4555)
  Bottom Layer w6: R53.2@4174,4540.47 4210.53,4540.47 4217.67,4533.33 ; 4218,4533 4217.67,4533.33 ; v1(4239,4555) 4239,4554.41 4217.92,4533.33 4217.67,4533.33
NetFPGA1_G9: FPGA1.G9 H6.3 | length 2656.5
  Top Layer w6: FPGA1.G9@4277.98,4672.72 4265.26,4672.72 4246.42,4653.88 4232.49,4653.88 4219.77,4641.16 4219.77,4627.23 4205.36,4612.83 4191.44,4612.83 4180.4,4601.79 4180.4,4546.81 4191.44,4535.77 4244.73,4535.77 4257.46,4523.05 4257.46,4509.12 4270.18,4496.4 4285.79,4496.4 4298.51,4509.12 4298.51,4523.05 4309.55,4534.09 4575.09,4534.09 v1(4576,4535) ; v1(5160.99,5007.37) 5161.83,5008.21 5191.3,5008.21 5202.34,5019.25 5202.34,5034.86 5191.3,5045.9 5177.38,5045.9 5164.65,5058.62 5164.65,5113.6 5175.69,5124.64 5228.99,5124.64 5241.71,5137.36 5241.71,5151.29 5256.12,5165.69 5270.04,5165.69 ; 5268.5,5165.5 5454.29,5165.5 5477.22,5188.43 5477.22,5666.88 5475.6,5668.5 5393.5,5668.5 H6.3@5328,5734
  Bottom Layer w6: v1(4576,4535) 4797.46,4535 5039,4776.54 5039,4885.38 v1(5160.99,5007.37)
NetFPGA1_H10: FPGA1.H10 R50.2 | length 75.7
  Top Layer w10: v1(4297.97,4692.3) 4317.65,4711.98 FPGA1.H10@4318.97,4713.3
  Bottom Layer w10: R50.2@4284,4724.47 4284,4706 v1@4295,4695 ; R50.2@4286.53,4724.47 R50.2@4286.53,4731 ; v1@4294.03,4694.03 v1@4297.89,4690.17
NetFPGA1_J10: FPGA1.J10 R52.2 | length 73.6
  Top Layer w10: v1(4337.34,4692.3) FPGA1.J10@4357.02,4711.98
  Bottom Layer w10: R52.2@4337,4649.5 4337.34,4649.84 R52.2@4337.34,4651.95 ; v1(4337.34,4692.3) R52.2@4337.34,4651.95 ; R52.2@4339.35,4649.94 R52.2@4337.34,4651.95
NetFPGA1_T30: FPGA1.T30 FPGA.T30 OSC3.3 | length 1862.3
  Top Layer w6: FPGA.T30@3408.39,4988.39 3410.07,4988.39 3428.91,4969.54 3510.77,4969.54 v1(3515.75,4964.57) ; v1(4418.5,5283) 4416.62,5284.88 4416.62,5308.77 4403.9,5321.49 4389.97,5321.49 4377.25,5334.21 4377.25,5389.19 4389.97,5401.91 4482.64,5401.91 4493.68,5412.95 4493.68,5426.88 4506.4,5439.6 4561.38,5439.6 4574.1,5426.88 4574.1,5412.95 4585.14,5401.91 4600.75,5401.91 4613.47,5414.64 4613.47,5428.56 4626.19,5441.28 4640.12,5441.28 4651.16,5452.32 4651.16,5480.65 FPGA1.T30@4632.31,5499.5 ; FPGA1.T30@4632.61,5499.39 4632.61,5501.07 4651.46,5519.91 4651.46,5601.77 v1(4656.43,5606.75)
  Bottom Layer w6: v1(3515.75,4964.57) 3555.12,4964.57 OSC3.3@3556.34,4963.34 ; OSC3.3@3557.5,4964.5 3663.65,4964.5 3843.52,5144.37 4290.53,5144.37 4367.96,5221.8 4422.09,5221.8 4435.08,5234.78 4435.08,5250.52 4418.5,5267.1 v1(4418.5,5283)
NetFPGA_AL2: FPGA.AL2 R36.1 R37.2 | length 168.1
  Top Layer w6: v1(2281.5,4376.08) 2284.27,4376.08 FPGA.AL2@2306.02,4397.84
  Bottom Layer w6: R37.2@2253.19,4312.87 2258.86,4307.2 2306.3,4307.2 2306.3,4345.69 2281.5,4370.49 v1(2281.5,4376.08)
NetFPGA_AL31: FPGA.AL31 H1.9 R44.2 | length 3580.2
  Top Layer w6: H1.9@2225.24,6317.52 2218.07,6317.52 2162.53,6261.98 2162.53,6202.04 2117.01,6156.53 2108.04,6156.53 2085.47,6133.96 2085.47,6102.04 2108.04,6079.47 2117.01,6079.47 2162.53,6033.96 2162.53,5964.2 2178.5,5948.23 2178.5,5501.13 2177.17,5499.8 2177.17,5494.48 2178.31,5493.33 2178.31,5383.52 2177.17,5382.37 2177.17,5326.82 2258.85,5245.13 2272.77,5245.13 2285.5,5232.41 2285.5,4903.53 2298.22,4890.8 2390.88,4890.8 2403.61,4878.08 2403.61,4824.79 2416.33,4812.06 2430.25,4812.06 2442.98,4799.34 2442.98,4783.73 2435.33,4776.09 2443.68,4767.74 2442.98,4767.03 2442.98,4626.25 2431.94,4615.21 2378.64,4615.21 2365.92,4602.49 2365.92,4508.14 2378.64,4495.42 2431.94,4495.42 2442.98,4484.38 2442.98,4470.46 2457.38,4456.05 2510.68,4456.05 2521.72,4445.01 2521.72,4431.09 2534.44,4418.36 2628.79,4418.36 2639.83,4429.4 2639.83,4443.32 2654.23,4457.73 2983.12,4457.73 2994.16,4468.77 2994.16,4482.69 3006.88,4495.42 3022.49,4495.42 3035.21,4482.69 3035.21,4468.77 3046.25,4457.73 3101.23,4457.73 3112.27,4468.77 3112.27,4522.06 3124.99,4534.79 3179.97,4534.79 3191.01,4523.75 3191.01,4509.83 3205.42,4495.42 3219.34,4495.42 3230.38,4484.38 3230.38,4470.46 3244.79,4456.05 3337.45,4456.05 3350.17,4443.32 3350.17,4429.4 3361.21,4418.36 3425.54,4418.36 3446.07,4397.84 FPGA.AL31@3447.76,4397.84
  Bottom Layer w6: H1.9@2227.44,6326.38 2237.53,6336.46 R44.2@2237.53,6378
NetFPGA_B2: FPGA.B2 R41.2 | length 61.7
  Top Layer w6: FPGA.B2@2306.02,5539.57 v1@2325.62,5519.97
  Bottom Layer w6: v1(2325.62,5517.18) 2328.17,5517.18 R41.2@2350.39,5539.41
NetFPGA_B3: FPGA.B3 H5.4 | length 304.6
  Top Layer w6: FPGA.B3@2342,5539 2339,5539 2319.59,5558.41 2299.68,5558.41 2267.34,5590.75 2267.34,5606.49 2402.84,5742 H5.4@2404,5742
NetFPGA_F6: FPGA.F6 R40.2 | length 64.8
  Top Layer w6: v1(2442.33,5403.08) 2463.32,5382.09 FPGA.F6@2463.5,5382.09
  Bottom Layer w6: v1(2442.33,5403.08) 2442.33,5431.19 R40.2@2447.13,5435.98
NetFPGA_G9: FPGA.G9 H5.3 | length 464.5
  Top Layer w6: H5.3@2505.91,5767.72 2523.4,5750.22 2523.4,5453.02 2536.12,5440.3 2550.05,5440.3 2561.09,5429.26 2561.09,5363.24 FPGA.G9@2581.61,5342.72
NetFPGA_H10: FPGA.H10 R38.2 | length 75.2
  Top Layer w10: v1(2601.3,5323.03) FPGA.H10@2620.98,5303.35 FPGA.H10@2622.3,5302.03
  Bottom Layer w10: v1@2599.17,5323.11 2610.54,5334.47 R38.2@2640,5334.47
NetFPGA_J10: FPGA.J10 R39.2 | length 71
  Top Layer w10: v1(2601.3,5283.66) FPGA.J10@2620.98,5263.98
  Bottom Layer w10: R39.2@2558.94,5281.65 2560.95,5283.66 v1(2601.3,5283.66)
NetR1_1: R1.1 SW.4 | length 384.7
  Top Layer w6: SW.4@2797.24,6236.22 2705.78,6236.22 2672.1,6269.89 2672.1,6344.94 2724.8,6397.64 R1.1@2820.87,6397.64
NetR7_2: R7.2 U.4 | length 237.2
  Bottom Layer w6: R7.2@5118,6349.5 5118,6249.49 5189.99,6177.5 U.4@5225.35,6177.5
NetR8_2: R8.2 R10.1 U.3 | length 296.5
  Bottom Layer w6: R8.2@5061.5,6353.5 5061,6353 5061,6274.99 5189.99,6146 U.3@5225.35,6146
VCCEXT: C1.1 C2.1 C11.1 C13.1 FET_H.5 FET_H.6 FET_H.7 FET_H.8 Power.1 Power.4 R6.2 U1.3 | length 1894.5
  Top Layer w6: R6.2@2753.23,6437.52 2902.13,6586.42
  Top Layer w140: C11.1@2290.51,6765.43 2302.17,6777.09 C11.1@2326.58,6801.5 ; C11.1@2298.58,6780.67 2319.41,6801.5 C11.1@2326.58,6801.5 ; Power.4@2300,7043.39 2501.34,6842.05 ; Power.4@2300,7060 2301,7060 Power.4@2303.5,7062.5 ; C11.1@2332.28,6807.2 C11.1@2326.58,6801.5 ; 2841.5,6801.5 C11.1@2326.58,6801.5 ; Power.1@2896,7062.5 Power.1@2899.25,7059.25 ; 2896.5,6597 2898.13,6598.63 2898.13,6715 2898.13,7058.13 Power.1@2899.25,7059.25 ; Power.1@2900,7060 Power.1@2899.25,7059.25 ; Power.1@2902,7056.5 Power.1@2899.25,7059.25 ; 2927.09,6946.1 U1.3@3238.19,6946.1